# Altium PCB PCB.PcbDoc (part 1 of 2)
Units mil, origin at the board's own origin, x right, y up, seen from the top; angles counter-clockwise.
Board outline 2519.69 x 5118.11 mil, 2 copper layers (Top Layer, Bottom Layer); 143 components, 68 nets, 346 pads, 668 vias.
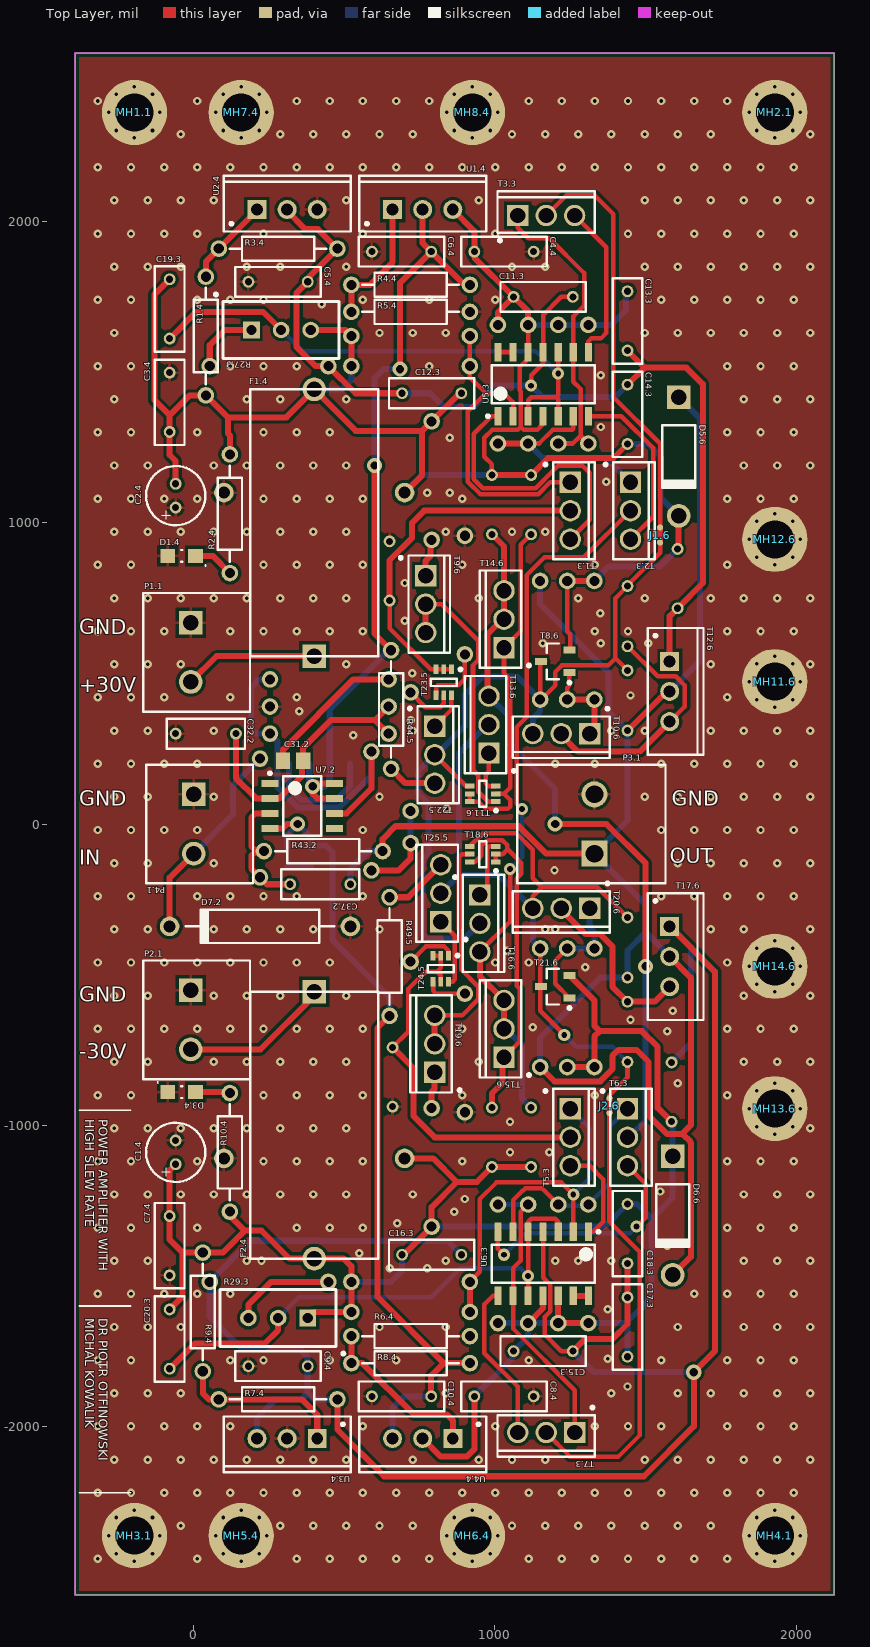
[diagram p0: Top Layer view]
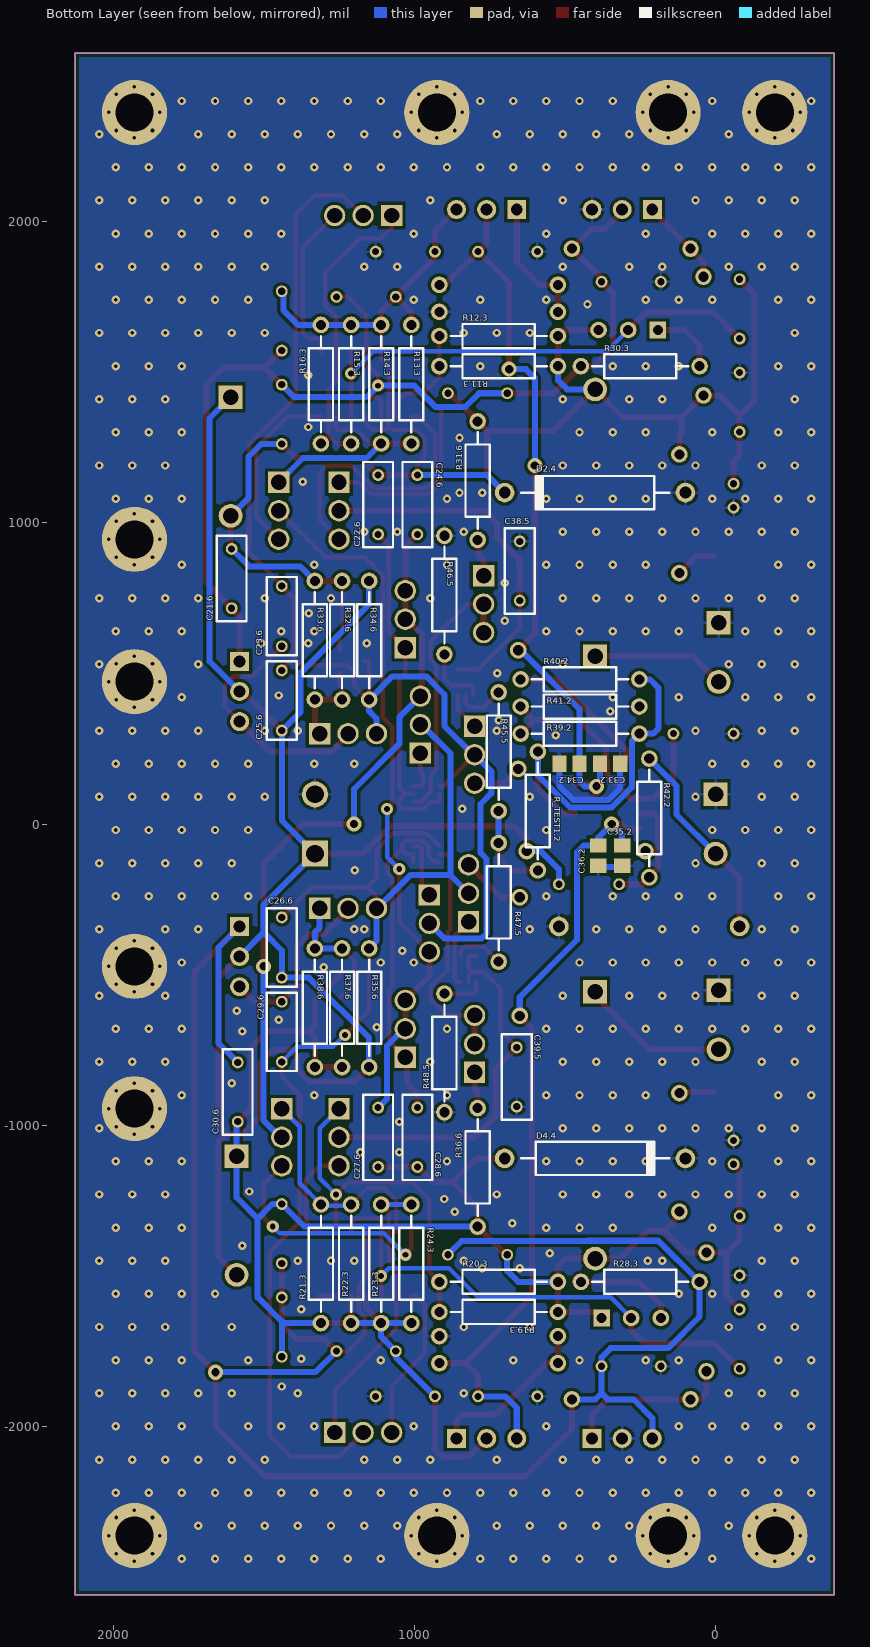
[diagram p1: Bottom Layer view, seen from below]
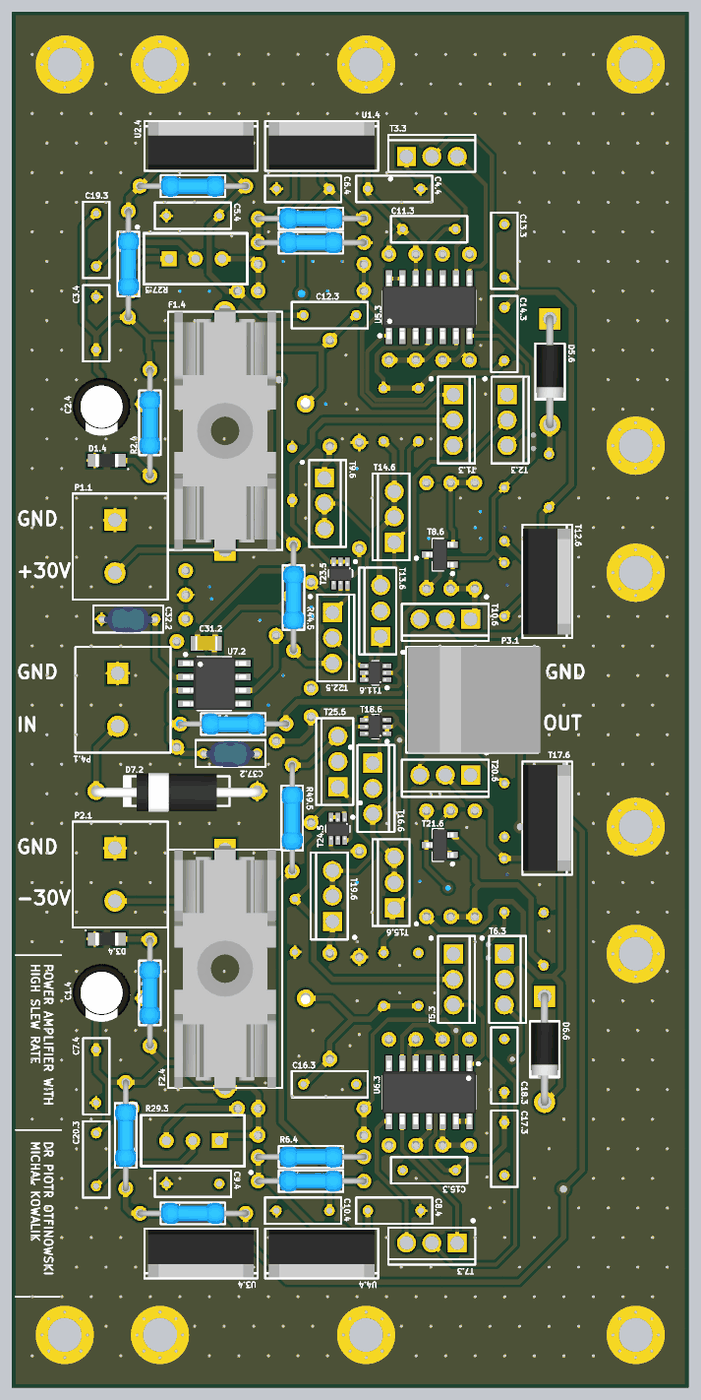
[diagram p3: 3D render of the assembled board from above, using the file's embedded part models]
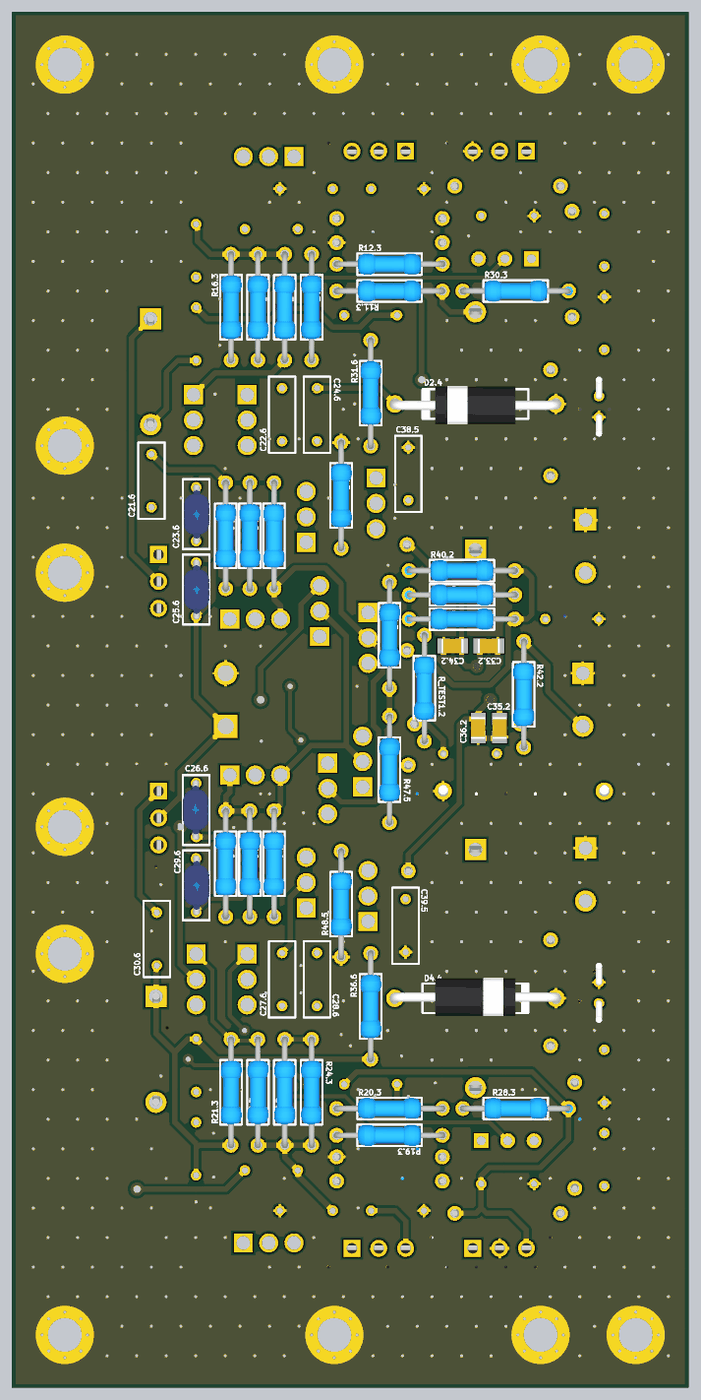
[diagram p4: 3D render of the assembled board from below, using the file's embedded part models]

## Layer stack, top to bottom
Top Solder: solder mask 0.4, Solder Resist, Dk 3.5
Top Layer: signal copper 1.4
Dielectric 1: dielectric 12.6, FR-4, Dk 4.8
Bottom Layer: signal copper 1.4
Bottom Solder: solder mask 0.4, Solder Resist, Dk 3.5

## Board outline
-393.7,-2559.06 2125.98,-2559.06 2125.98,2559.06 -393.7,2559.06

## Design rules (kind name [scope] priority, off if disabled: settings)
Clearance [All] p1: gap=10 ignorepadtopadclearanceinfootprint=FALSE except(0: Arc-Hole Track-Hole SMDPad-Hole THPad-Hole Via-Hole Fill-Hole Poly-Hole Region-Hole Text-Hole; 5: Arc-Arc Arc-Track Arc-SMDPad Track-Track Track-SMDPad SMDPad-SMDPad)
ComponentClearance [All] p1: gap=5 collisioncheckmode=3 verticalgap=5 showdistances=FALSE
HoleSize [All] p1: absolutevalues=TRUE maxlimit=393.7 minlimit=0.98 maxpercent=80.000 minpercent=20.000
MinimumSolderMaskSliver [All] p1: minsoldermaskwidth=7
PolygonConnect PolygonConnect_MH [HasFootprint('MOUNTING HOLE 2mm') or HasFootprint('MOUNTING HOLE 3mm')] p1: connectstyle=Direct reliefconductorwidth=10 reliefentries=4 polygonreliefangle="90 Angle" airgapwidth=10
PolygonConnect PolygonConnect_Via [IsVia] p2: connectstyle=Direct reliefconductorwidth=10 reliefentries=4 polygonreliefangle="90 Angle" airgapwidth=10
PolygonConnect [All] p3: connectstyle=Relief reliefconductorwidth=10 reliefentries=4 polygonreliefangle="90 Angle" airgapwidth=10
RoutingVias [All] p1: holewidth=28 width=50 viastyle="Through Hole" minholewidth=28 minwidth=50 maxholewidth=28 maxwidth=50 useviatemplates=TRUE viatemplateguid#1={2FC1EF2C-54B0-4321-A922-B4E43FDCBC3B} viatemplateguid#2={2E20B9D3-F2B5-4AFD-9AF6-546D8C0396F4} viatemplateguid#3={80472CAA-2F3E-4CAC-A699-F1DE7C723AF1} viatemplateguid#4={2B6C0CF2-D053-47F0-8854-E021E3530479} viatemplateguid#5={2C5E05DE-B0FE-4110-8685-EAD3206BB58E} viatemplatename#1=v71h30m0mx0 viatemplatename#2=v71h30m71 viatemplatename#3=v102h50m0mx0 viatemplatename#4=v127h70m0mx0 viatemplatename#5=v150h100m0mx0
SilkToSilkClearance [All] p1: silktosilkclearance=3
SilkToSolderMaskClearance [IsPad] p1: minsilkscreentomaskgap=5 clearancetoexposedcopper=TRUE
SolderMaskExpansion [All] p1: expansion=5
Width "Schematic Width Constraint_10" [InNet('+25V')] p1: maxlimit=20 minlimit=12 preferedwidth=15
Width "Schematic Width Constraint_9" [InNet('+30V')] p2: maxlimit=20 minlimit=12 preferedwidth=15
Width "Schematic Width Constraint_8" [InNet('-25V')] p3: maxlimit=20 minlimit=12 preferedwidth=15
Width "Schematic Width Constraint_7" [InNet('-30V')] p4: maxlimit=20 minlimit=12 preferedwidth=15
Width "Schematic Width Constraint_6" [InNet('GLOBAL_FEEDBACK')] p5: maxlimit=20 minlimit=12 preferedwidth=15
Width "Schematic Width Constraint_5" [InNet('IN_N_3_STAGE')] p6: maxlimit=20 minlimit=12 preferedwidth=15
Width "Schematic Width Constraint_4" [InNet('IN_P_3_STAGE')] p7: maxlimit=20 minlimit=12 preferedwidth=15
Width "Schematic Width Constraint_3" [InNet('NetC23.6_1')] p8: maxlimit=20 minlimit=12 preferedwidth=15
Width "Schematic Width Constraint_2" [InNet('NetC29.6_2')] p9: maxlimit=20 minlimit=12 preferedwidth=15
Width "Schematic Width Constraint_1" [InNet('NetR32.6_1')] p10: maxlimit=20 minlimit=12 preferedwidth=15
Width "Schematic Width Constraint" [InNet('NetR37.6_2')] p11: maxlimit=20 minlimit=12 preferedwidth=15
Width Width_POWER [InNetClass('POWER')] p12: maxlimit=30 minlimit=15 preferedwidth=25 minimp=50.000000 maximp=50.000000 favimp=50.000000
Width [Not InNetClass('POWER')] p13: maxlimit=20 minlimit=10 preferedwidth=15 minimp=50.000000 maximp=50.000000 favimp=50.000000
25 further rules are at their usual default settings.

## Classes and differential pairs
net class IBIAS_P[1..4]: IBIAS_P1 IBIAS_P2 IBIAS_P3
net class IBIAS_N[1..4]: IBIAS_N1 IBIAS_N2 IBIAS_N3
component class U_ThirdStageAmplifier: C21.6 C22.6 C23.6 C24.6 C25.6 C26.6 C27.6 C28.6 C29.6 C30.6 D5.6 D6.6 J1.6 J2.6 MH11.6 MH12.6 MH13.6 MH14.6 R31.6 R32.6 R33.6 R34.6 R35.6 R36.6 R37.6 R38.6 T8.6 T9.6 T10.6 T11.6 T12.6 T13.6 T14.6 T15.6 T16.6 T17.6 T18.6 T19.6 T20.6 T21.6
component class U_SecondStageAmplifier: C38.5 C39.5 R44.5 R45.5 R46.5 R47.5 R48.5 R49.5 T22.5 T23.5 T24.5 T25.5
component class U_Power: C1.4 C2.4 C3.4 C4.4 C5.4 C6.4 C7.4 C8.4 C9.4 C10.4 D1.4 D2.4 D3.4 D4.4 F1.4 F2.4 MH5.4 MH6.4 MH7.4 MH8.4 R1.4 R2.4 R3.4 R4.4 R5.4 R6.4 R7.4 R8.4 R9.4 R10.4 U1.4 U2.4 U3.4 U4.4
component class U_FirstStageAmplifier: C31.2 C32.2 C33.2 C34.2 C35.2 C36.2 C37.2 D7.2 R39.2 R40.2 R41.2 R42.2 R43.2 R_TEST1.2 U7.2
component class U_CurrentSources: C11.3 C12.3 C13.3 C14.3 C15.3 C16.3 C17.3 C18.3 C19.3 C20.3 R11.3 R12.3 R13.3 R14.3 R15.3 R16.3 R19.3 R20.3 R21.3 R22.3 R23.3 R24.3 R27.3 R28.3 R29.3 R30.3 T1.3 T2.3 T3.3 T5.3 T6.3 T7.3 U5.3 U6.3
component class Main: MH1.1 MH2.1 MH3.1 MH4.1 P1.1 P2.1 P3.1 P4.1

## Components (designator, comment, footprint, x,y, rotation, side; value= is the part's Value field where it differs from the comment)
C1.4 "Cap4 UPW" CAP-POLARISED-2MM -60,-1090 r270 top locked value=47uF (schematic designator C1)
C2.4 "Cap4 UPW" CAP-POLARISED-2MM -60,1090 r270 top locked value=47uF (schematic designator C2)
C3.4 "Cap1 MKS2" CAP-0.5-WIMA_MKS2 -80,1400 r270 top locked value=100nF (schematic designator C3)
C4.4 "Cap1 MKS2" CAP-0.5-WIMA_MKS2 1030,1900 r180 top locked value=100nF (schematic designator C4)
C5.4 "Cap1 MKS2" CAP-0.5-WIMA_MKS2 280,1800 r0 top locked value=100nF (schematic designator C5)
C6.4 "Cap1 MKS2" CAP-0.5-WIMA_MKS2 690,1900 r0 top locked value=100nF (schematic designator C6)
C7.4 "Cap1 MKS2" CAP-0.5-WIMA_MKS2 -80,-1400 r270 top locked value=100nF (schematic designator C7)
C8.4 "Cap1 MKS2" CAP-0.5-WIMA_MKS2 1030,-1900 r0 top locked value=100nF (schematic designator C8)
C9.4 "Cap1 MKS2" CAP-0.5-WIMA_MKS2 280,-1800 r180 top locked value=100nF (schematic designator C9)
C10.4 "Cap1 MKS2" CAP-0.5-WIMA_MKS2 690,-1900 r180 top locked value=100nF (schematic designator C10)
C11.3 "Cap1 MKS2" CAP-0.5-WIMA_MKS2 1160,1750 r180 top locked value=100nF (schematic designator C11)
C12.3 "Cap1 MKS2" CAP-0.5-WIMA_MKS2 790,1430 r0 top locked value=100nF (schematic designator C12)
C13.3 "Cap1 MKS2" CAP-0.5-WIMA_MKS2 1440,1670 r90 top locked value=100nF (schematic designator C13)
C14.3 "Cap1 MKS2" CAP-0.5-WIMA_MKS2 1440,1360 r270 top locked value=100nF (schematic designator C14)
C15.3 "Cap1 MKS2" CAP-0.5-WIMA_MKS2 1160,-1750 r0 top locked value=100nF (schematic designator C15)
C16.3 "Cap1 MKS2" CAP-0.5-WIMA_MKS2 790,-1430 r0 top locked value=100nF (schematic designator C16)
C17.3 "Cap1 MKS2" CAP-0.5-WIMA_MKS2 1440,-1670 r90 top locked value=100nF (schematic designator C17)
C18.3 "Cap1 MKS2" CAP-0.5-WIMA_MKS2 1440,-1360 r270 top locked value=100nF (schematic designator C18)
C19.3 "Cap1 MKS2" CAP-0.5-WIMA_MKS2 -80,1710 r90 top locked value=100nF (schematic designator C19)
C20.3 "Cap1 MKS2" CAP-0.5-WIMA_MKS2 -80,-1710 r270 top locked value=100nF (schematic designator C20)
C21.6 "Cap1 MKS2" CAP-0.5-WIMA_MKS2 1606.3,814.65 r90 bottom locked value=100nF (schematic designator C21)
C22.6 "Cap1 MKS2" CAP-0.5-WIMA_MKS2 1120,1060 r90 bottom locked value=100nF (schematic designator C22)
C23.6 "Cap2 C322" CAP-CERAMIC-200MIL 1440,690 r90 bottom locked value=470pF (schematic designator C23)
C24.6 "Cap1 MKS2" CAP-0.5-WIMA_MKS2 990,1060 r90 bottom locked value=100nF (schematic designator C24)
C25.6 "Cap2 C322" CAP-CERAMIC-200MIL 1440,410 r90 bottom locked value=470pF (schematic designator C25)
C26.6 "Cap2 C322" CAP-CERAMIC-200MIL 1440,-410 r270 bottom locked value=470pF (schematic designator C26)
C27.6 "Cap1 MKS2" CAP-0.5-WIMA_MKS2 1120,-1040 r90 bottom locked value=100nF (schematic designator C27)
C28.6 "Cap1 MKS2" CAP-0.5-WIMA_MKS2 990,-1040 r90 bottom locked value=100nF (schematic designator C28)
C29.6 "Cap2 C322" CAP-CERAMIC-200MIL 1440,-690 r90 bottom locked value=470pF (schematic designator C29)
C30.6 "Cap1 MKS2" CAP-0.5-WIMA_MKS2 1586.3,-889.84 r90 bottom locked value=100nF (schematic designator C30)
C31.2 "Cap3" CAP_0805_IPC_MD 330,210 r180 top locked value=100pF (schematic designator C31)
C32.2 "Cap2 C322" CAP-CERAMIC-200MIL 40,300 r0 top locked value=470pF (schematic designator C32)
C33.2 "Cap3" CAP_0805_IPC_MD 350,200 r0 bottom value=100pF (schematic designator C33)
C34.2 "Cap3" CAP_0805_IPC_MD 485,200 r180 bottom locked value=100pF (schematic designator C34)
C35.2 "Cap3" CAP_0805_IPC_MD 310,-105 r270 bottom value=100pF (schematic designator C35)
C36.2 "Cap3" CAP_0805_IPC_MD 390,-105 r270 bottom value=100pF (schematic designator C36)
C37.2 "Cap2 C322" CAP-CERAMIC-200MIL 420,-200 r0 top locked value=470pF (schematic designator C37)
C38.5 "Cap1 MKS2" CAP-0.5-WIMA_MKS2 650,840 r270 bottom locked value=100nF (schematic designator C38)
C39.5 "Cap1 MKS2" CAP-0.5-WIMA_MKS2 660,-840 r270 bottom locked value=100nF (schematic designator C39)
D1.4 "LED RED" DIO_0805_IPC_MD -40,890 r180 top locked (schematic designator D1)
D2.4 "1.5KE47C" DIODE-0.7 400,1100 r0 bottom locked (schematic designator D2)
D3.4 "LED BLUE" DIO_0805_IPC_MD -40,-890 r0 top locked (schematic designator D3)
D4.4 "1.5KE47C" DIODE-0.7 400,-1110 r180 bottom locked (schematic designator D4)
D5.6 "1N4004" DO-41 1610,1220 r270 top locked (schematic designator D5)
D6.6 "1N4004" DO-41 1590,-1300 r270 top locked (schematic designator D6)
D7.2 "1.5KE47CA" DIODE-0.7 220,-340 r180 top locked (schematic designator D7)
F1.4 "SCHURTER 0031.8201" "SCHURTER 0031.8201" 400,1000 r90 top locked value=200mA (schematic designator F1)
F2.4 "SCHURTER 0031.8201" "SCHURTER 0031.8201" 400,-1000 r270 top locked value=200mA (schematic designator F2)
J1.6 "NetTie" NETTIE_20mil 1548.23,984.25 r270 top net-tie (schematic designator J1)
J2.6 "NetTie" NETTIE_20mil 1380,-960 r90 top net-tie (schematic designator J2)
MH1.1 "Mounting Hole" "MOUNTING HOLE 3mm" -196.85,2362.2 r0 top locked (schematic designator MH1)
MH2.1 "Mounting Hole" "MOUNTING HOLE 3mm" 1929.13,2362.2 r0 top locked (schematic designator MH2)
MH3.1 "Mounting Hole" "MOUNTING HOLE 3mm" -196.85,-2362.2 r0 top locked (schematic designator MH3)
MH4.1 "Mounting Hole" "MOUNTING HOLE 3mm" 1929.13,-2362.2 r0 top locked (schematic designator MH4)
MH5.4 "Mounting Hole" "MOUNTING HOLE 3mm" 157.48,-2362.2 r0 top locked (schematic designator MH5)
MH6.4 "Mounting Hole" "MOUNTING HOLE 3mm" 925.2,-2362.2 r0 top locked (schematic designator MH6)
MH7.4 "Mounting Hole" "MOUNTING HOLE 3mm" 157.48,2362.2 r0 top locked (schematic designator MH7)
MH8.4 "Mounting Hole" "MOUNTING HOLE 3mm" 925.2,2362.2 r0 top locked (schematic designator MH8)
MH11.6 "Mounting Hole" "MOUNTING HOLE 3mm" 1929.13,472.44 r90 top locked (schematic designator MH11)
MH12.6 "Mounting Hole" "MOUNTING HOLE 3mm" 1929.13,944.88 r90 top locked (schematic designator MH12)
MH13.6 "Mounting Hole" "MOUNTING HOLE 3mm" 1929.13,-944.88 r90 top locked (schematic designator MH13)
MH14.6 "Mounting Hole" "MOUNTING HOLE 3mm" 1929.13,-472.44 r90 top locked (schematic designator MH14)
P1.1 "Header 2" DG300-5.0-02P-13 -10,570 r270 top locked (schematic designator P1)
P2.1 "Header 2" DG300-5.0-02P-13 -10,-650 r270 top locked (schematic designator P2)
P3.1 "Header 2" DG330-5.0-02P 1330,0 r90 top locked (schematic designator P3)
P4.1 "Header 2" DG300-5.0-02P-13 0,0 r270 top locked (schematic designator P4)
R1.4 "Res" RESISTOR-10mm 40,1620 r270 top locked value=1K (schematic designator R1)
R2.4 "Res" RESISTOR-10mm 120,1030 r90 top locked value=1K (schematic designator R2)
R3.4 "Res" RESISTOR-10mm 280,1910 r180 top locked value=1K (schematic designator R3)
R4.4 "Res" RESISTOR-10mm 720,1790 r180 top locked value=1K (schematic designator R4)
R5.4 "Res" RESISTOR-10mm 720,1700 r180 top locked value=1K (schematic designator R5)
R6.4 "Res" RESISTOR-10mm 720,-1700 r180 top locked value=1K (schematic designator R6)
R7.4 "Res" RESISTOR-10mm 280,-1910 r180 top locked value=1K (schematic designator R7)
R8.4 "Res" RESISTOR-10mm 720,-1790 r180 top locked value=1K (schematic designator R8)
R9.4 "Res" RESISTOR-10mm 30,-1620 r270 top locked value=1K (schematic designator R9)
R10.4 "Res" RESISTOR-10mm 120,-1090 r270 top locked value=1K (schematic designator R10)
R11.3 "Res" RESISTOR-10mm 720,1520 r180 bottom locked value=1K (schematic designator R11)
R12.3 "Res" RESISTOR-10mm 720,1620 r180 bottom locked value=1K (schematic designator R12)
R13.3 "Res" RESISTOR-10mm 1010,1460 r90 bottom locked value=1K (schematic designator R13)
R14.3 "Res" RESISTOR-10mm 1110,1460 r90 bottom locked value=1K (schematic designator R14)
R15.3 "Res" RESISTOR-10mm 1210,1460 r90 bottom locked value=1K (schematic designator R15)
R16.3 "Res" RESISTOR-10mm 1310,1460 r90 bottom locked value=1K (schematic designator R16)
R19.3 "Res" RESISTOR-10mm 720,-1620 r0 bottom locked value=1K (schematic designator R19)
R20.3 "Res" RESISTOR-10mm 720,-1520 r0 bottom locked value=1K (schematic designator R20)
R21.3 "Res" RESISTOR-10mm 1310,-1460 r90 bottom locked value=1K (schematic designator R21)
R22.3 "Res" RESISTOR-10mm 1210,-1460 r90 bottom locked value=1K (schematic designator R22)
R23.3 "Res" RESISTOR-10mm 1110,-1460 r90 bottom locked value=1K (schematic designator R23)
R24.3 "Res" RESISTOR-10mm 1010,-1460 r90 bottom locked value=1K (schematic designator R24)
R27.3 "Pot" T910W 290,1640 r0 top locked value=1K (schematic designator R27)
R28.3 "Res" RESISTOR-10mm 250,-1520 r180 bottom locked value=1K (schematic designator R28)
R29.3 "Pot" T910W 280,-1640 r180 top locked value=1K (schematic designator R29)
R30.3 "Res" RESISTOR-10mm 250,1520 r180 bottom locked value=1K (schematic designator R30)
R31.6 "Res" RESISTOR-10mm 790,1140 r90 bottom locked value=1K (schematic designator R31)
R32.6 "Res" RESISTOR-10mm 1240,610 r90 bottom locked value=1K (schematic designator R32)
R33.6 "Res" RESISTOR-10mm 1330,610 r90 bottom locked value=1K (schematic designator R33)
R34.6 "Res" RESISTOR-10mm 1150,610 r270 bottom locked value=1K (schematic designator R34)
R35.6 "Res" RESISTOR-10mm 1150,-610 r270 bottom locked value=1K (schematic designator R35)
R36.6 "Res" RESISTOR-10mm 790,-1140 r90 bottom locked value=1K (schematic designator R36)
R37.6 "Res" RESISTOR-10mm 1240,-610 r90 bottom locked value=1K (schematic designator R37)
R38.6 "Res" RESISTOR-10mm 1330,-610 r90 bottom locked value=1K (schematic designator R38)
R39.2 "Res" RESISTOR-10mm 450,300 r180 bottom locked value=1K (schematic designator R39)
R40.2 "Res" RESISTOR-10mm 450,480 r180 bottom locked value=1K (schematic designator R40)
R41.2 "Res" RESISTOR-10mm 450,390 r0 bottom locked value=1K (schematic designator R41)
R42.2 "Res" RESISTOR-10mm 220,20 r270 bottom locked value=1K (schematic designator R42)
R43.2 "Res" RESISTOR-10mm 430,-90 r0 top locked value=1K (schematic designator R43)
R44.5 "Res" RESISTOR-10mm 655,380 r90 top locked value=1K (schematic designator R44)
R45.5 "Res" RESISTOR-10mm 720,240 r90 bottom locked value=1K (schematic designator R45)
R46.5 "Res" RESISTOR-10mm 900,760 r270 bottom locked value=1K (schematic designator R46)
R47.5 "Res" RESISTOR-10mm 720,-260 r90 bottom locked value=1K (schematic designator R47)
R48.5 "Res" RESISTOR-10mm 900,-760 r270 bottom locked value=1K (schematic designator R48)
R49.5 "Res" RESISTOR-10mm 650,-440 r270 top locked value=1K (schematic designator R49)
R_TEST1.2 "Res" RESISTOR-10mm 590,43.15 r270 bottom locked value=1K (schematic designator R_TEST1)
T1.3 "TTA006B" TO-126 1250,1040 r0 top locked (schematic designator T1)
T2.3 "TTA006B" TO-126 1450,1040 r0 top locked (schematic designator T2)
T3.3 "TTA006B" TO-126 1170,2020 r90 top locked (schematic designator T3)
T5.3 "TTC011B" TO-126 1250,-1040 r0 top locked (schematic designator T5)
T6.3 "TTC011B" TO-126 1440,-1040 r0 top locked (schematic designator T6)
T7.3 "TTC011B" TO-126 1170,-2020 r270 top locked (schematic designator T7)
T8.6 "BCX42 PNP" SOT23_IPC_MD 1200,540 r180 top locked (schematic designator T8)
T9.6 "TTA006B" TO-126 770,730 r0 top locked (schematic designator T9)
T10.6 "TTA006B" TO-126 1220,300 r270 top locked (schematic designator T10)
T11.6 "BCM857BS" SOT363_IPC_MD 960,100 r180 top locked (schematic designator T11)
T12.6 "MJE15033" TO-220 1580,440 r270 top locked (schematic designator T12)
T13.6 "TTA006B" TO-126 980,330 r180 top locked (schematic designator T13)
T14.6 "TTA006B" TO-126 1030,680 r180 top locked (schematic designator T14)
T15.6 "TTC011B" TO-126 1030,-680 r180 top locked (schematic designator T15)
T16.6 "TTC011B" TO-126 950,-330 r0 top locked (schematic designator T16)
T17.6 "MJE15032" TO-220 1580,-440 r270 top locked (schematic designator T17)
T18.6 "DMMT3904W" SOT363_IPC_MD 960,-100 r180 top locked (schematic designator T18)
T19.6 "TTC011B" TO-126 800,-730 r180 top locked (schematic designator T19)
T20.6 "TTC011B" TO-126 1220,-280 r270 top locked (schematic designator T20)
T21.6 "BCX41 NPN" SOT23_IPC_MD 1200,-540 r180 top locked (schematic designator T21)
T22.5 "TTC011B" TO-126 800,230 r0 top locked (schematic designator T22)
T23.5 "DMMT3904W" SOT363_IPC_MD 830,470 r270 top locked (schematic designator T23)
T24.5 "BCM857BS" SOT363_IPC_MD 820,-480 r270 top locked (schematic designator T24)
T25.5 "TTA006B" TO-126 820,-230 r180 top locked (schematic designator T25)
U1.4 "LM317" TO-220 760,2040 r0 top locked (schematic designator U1)
U2.4 "LM317" TO-220 310,2040 r0 top locked (schematic designator U2)
U3.4 "LM337" TO-220 310,-2040 r180 top locked (schematic designator U3)
U4.4 "LM337" TO-220 760,-2040 r180 top locked (schematic designator U4)
U5.3 "MCP6074" SO_14_IPC_MD 1160,1460 r90 top locked (schematic designator U5)
U6.3 "MCP6074" SO_14_IPC_MD 1160,-1460 r270 top locked (schematic designator U6)
U7.2 "ADA4895-1" SOIC_8_IPC_MD 360,60 r0 top locked (schematic designator U7)

## Footprints (in the part's own frame and the unit in brackets; to place one, negate y for a bottom-side part, rotate by r counter-clockwise, add the part's x,y. Pads: shape width x height; smd on the part's side, far side on the other; paste and mask are expansions set on the pad)
CAP-0.5-WIMA_MKS2 [mm] "Metallized Polyester (PET)   Capacitors in PCM 5 mm"
  round 1 hole 0.6: 1(-2.5,0) 2(2.5,0)
  silkscreen extent -3.6,-1.25 3.6,1.25, body extent -3.6,-1.25 3.6,1.25, height 6.5
CAP-CERAMIC-200MIL [mm] "UPW, Aluminium Electrolytic Capacitor"
  round 1 hole 0.6: 1(-2.54,0) 2(2.54,0)
  silkscreen extent -3.3,-1.27 3.3,1.27, body extent -2.83,-1.27 2.83,1.18, height 6.7
CAP-POLARISED-2MM [mm] "UPW, Aluminium Electrolytic Capacitor"
  round 1 hole 0.6: 1(-1,0) 2(1,0)
  silkscreen extent -2.5,-2.5 2.5,2.5, body extent -2.84,-2.75 2.84,2.75, height 13
CAP_0805_IPC_MD [mm] "Chip Capacitor, 2-Leads, Body 2.00x1.25mm, IPC Medium Density"
  rect 1.2x1.4 smd: 1(-0.85,0) 2(0.85,0)
  body extent -1.05,-0.67 1.05,0.67, height 1.35
DG300-5.0-02P-13 [mm]
  rect 2x2 hole 1.3: 1(-2.5,0)
  round 2 hole 1.3: 2(2.5,0)
  silkscreen extent -5,-4 5,5, body extent -5.5,-3.2 5.1,4.4, height 10
DG330-5.0-02P [mm]
  rect 2.2x2.2 hole 1.5: 1(-2.5,0)
  round 2.2 hole 1.5: 2(2.5,0)
  silkscreen extent -5,-6 5,6.5, body extent -5,-6.2 5,6.3, height 12.5
DIO_0805_IPC_MD [mm] "Chip Diode, 2-Leads, Body 2,00x1,25mm, IPC Medium Density"
  rect 1.25x1.2 smd: 1(-1.175,0) 2(1.175,0)
  silkscreen extent -2.06,-0.5 0.05,0.86, body extent -1.1,-0.63 1.1,0.63, height 1.1
DIODE-0.7 [mm] "Diode, Thru-Hole; 2 Leads; 0.7 in Pin Spacing"
  round 1.65 hole 1: 1(-7.62,0) 2(7.62,0)
  silkscreen extent -6.25,-1.4 6.25,1.4, body extent -8.07,-1.94 8.07,2.02, height 6.2
DO-41 [mm] "Diode, Axial; Body 5.2 x 2.7 mm (LxDia. max), Lead Dia. 0.86 mm (max)"
  rect 2x2 hole 1.3: 1(-5,0)
  round 2 hole 1.3: 2(5,0)
  silkscreen extent -2.65,-1.4 2.75,1.4, body extent -5.38,-1.25 5.32,1.25, height 4.75
"MOUNTING HOLE 3mm" [mm]
  round 5.5 hole 3.2 paste+0 mask+0: MOUNTING(0,0)
NETTIE_20mil [mil]
  round 20 smd paste+0 mask+0: 1(0,0) 2(50,0)
  Top Layer lines w20: 50,0 0,0
RESISTOR-10mm [mm] "Axial Device, Thru-Hole; 2 Leads; 0.4 in Pin Spacing"
  round 1.4 hole 0.85: 1(-5,0) 2(5,0)
  silkscreen extent -4.06,-1.02 4.06,1.02, body extent -5.27,-1 5.27,1, height 4.5
"SCHURTER 0031.8201" [mm] "Fuseholder Open Design, 5 x 20 mm, THT, var. Covers, IEC 60335-1"
  rect 2x2 hole 1.3: 1(-11.25,0)
  round 2 hole 1.3: 2(11.25,0)
  silkscreen extent -11.25,-5.4 11.25,5.4, body extent -11.55,-4.8 11.55,4.8, height 13.1
SO_14_IPC_MD [mm] "SOP, 14-Leads, Body 8,65x3,90mm, Pitch 1,27mm, IPC Medium Density"
  rect 1.55x0.6 smd: 1(-2.7,3.81) 2(-2.7,2.54) 3(-2.7,1.27) 4(-2.7,0) 5(-2.7,-1.27) 6(-2.7,-2.54) 7(-2.7,-3.81) 8(2.7,-3.81) 9(2.7,-2.54) 10(2.7,-1.27) 11(2.7,0) 12(2.7,1.27) 13(2.7,2.54) 14(2.7,3.81)
  silkscreen extent -2.82,-4.35 1.6,4.78, body extent -3,-4.4 3,4.4, height 1.75
SOIC_8_IPC_MD [mm] "SOIC, 8-Leads, Pitch 1,27mm, IPC Medium Density"
  rect 1.45x0.6 smd: 1(-2.725,1.905) 2(-2.725,0.635) 3(-2.725,-0.635) 4(-2.725,-1.905) 5(2.725,-1.905) 6(2.725,-0.635) 7(2.725,0.635) 8(2.725,1.905)
  silkscreen extent -2.85,-2.5 1.6,2.88, body extent -3,-2.5 3,2.5, height 1.75
SOT23_IPC_MD [mm] "SOT23, 3-Leads, Body 2.90x2.45mm, Pitch 0.95mm, IPC Medium Density"
  rect 1x0.6 smd: 1(-1.2,0.95) 2(-1.2,-0.95) 3(1.2,0)
  silkscreen extent -1.33,-1.5 0.7,1.92, body extent -1.3,-1.5 1.3,1.5, height 1.1
SOT363_IPC_MD [mm] "TSOP, 6-Leads, Body 2,00x1,25mm, Pitch 0,65mm, IPC Medium Density"
  rect 0.8x0.42 smd: 1(-1.1,0.65) 2(-1.1,0) 3(-1.1,-0.65) 4(1.1,-0.65) 5(1.1,0) 6(1.1,0.65)
  silkscreen extent -1.23,-1.1 0.3,1.53, body extent -1.02,-1.1 1.02,1.1, height 1.22
T910W [mm]
  rect 1.4x1.4 hole 0.85: 1(-2.5,0)
  round 1.4 hole 0.85: 2(0,0) 3(2.5,0)
  silkscreen extent -5.62,-2.4 4.9,3.12, body extent -4.75,-2.4 4.75,2.4, height 11.5
TO-126 [mm] "FM, 3-Leads, Body 8.2x3.5mm, Pitch 2.4mm"
  rect 1.8x1.8 hole 1.3: 1(0,2.4)
  round 1.8 hole 1.3: 2(0,0) 3(0,-2.4)
  silkscreen extent -2.22,-4.1 2.05,4.1, body extent -1.45,-4.1 2.05,4.1, height 13.1
TO-220 [mm] "TO, Thru-Hole, Vertical, Heatsink Mounted; 3 In-Line Leads; Pitch 2.54 mm"
  rect 1.6x1.6 hole 1: 1(-2.54,0)
  round 1.6 hole 1: 2(0,0) 3(2.54,0)
  silkscreen extent -5.35,-1.85 5.35,2.85, body extent -5,-1.78 5,2.74, height 20.04

## Part data
C1.4 C2.4: library part Cap4, "Nichicon UPW Aluminium Electrolytic Capacitor"
C3.4 C4.4 C5.4 C6.4 C7.4 C8.4 C9.4 C10.4 C11.3 C12.3 C13.3 C14.3 C15.3 C16.3 C17.3 C18.3 C19.3 C20.3 C21.6 C22.6 C24.6 C27.6 C28.6 C30.6 C38.5 C39.5: library part Cap1, "WIMA MKS2 Metallized Polyester (PET)  / Capacitors in PCM 5 mm"
C23.6 C25.6 C26.6 C29.6 C32.2 C37.2: library part Cap2, "KEMEX Radial Leaded Multilayer Ceramic Capacitors / Goldmax, 300 Series, Conformally Coated,  / C0G Dielectric, 25 – 250 VDC (Commercial Grade)"
C31.2 C33.2 C34.2 C35.2 C36.2: "Standard SMD 0805 Capacitor"
D1.4: "Standard SMD 0805 Red LED", LatestRevisionDate=08-Jul-2005, LatestRevisionNote="Mech Layer 1 removed.", PackageDescription="LED; 2 Leads", PackageReference=LED-1, Published=8-Jun-2000, Publisher="Altium Limited"
D2.4 D4.4 D7.2: "Transient Voltage Suppressor Diodes; Breakdown V: 44.7...49.4, Stand-off V: 40.2"
D3.4: "Standard SMD 0805 Blue LED", LatestRevisionDate=08-Jul-2005, LatestRevisionNote="Mech Layer 1 removed.", PackageDescription="LED; 2 Leads", PackageReference=LED-1, Published=8-Jun-2000, Publisher="Altium Limited"
D5.6 D6.6: "Standard Recovery Rectifier Diodes"
F1.4 F2.4: library part Fuse, "Fuseholder Open Design, 5 x 20 mm, THT, SCHURTER 0031.8201"
P1.1 P2.1 P3.1 P4.1: "Header, 2-Pin", LatestRevisionDate=17-Jul-2002, LatestRevisionNote="Re-released for DXP Platform.", Publisher="Altium Limited"
R1.4 R2.4 R3.4 R4.4 R5.4 R6.4 R7.4 R8.4 R9.4 R10.4 R11.3 R12.3 R13.3 R14.3 R15.3 R16.3 R19.3 R20.3 R21.3 R22.3 R23.3 R24.3 R28.3 R30.3 R31.6 R32.6 R33.6 R34.6 R35.6 R36.6 R37.6 R38.6 R39.2 R40.2 R41.2 R42.2 R43.2 R44.5 R45.5 R46.5 R47.5 R48.5 R49.5 R_TEST1.2: "Resistor"
R27.3 R29.3: "Potentiometer"
T1.3 T2.3 T3.3 T9.6 T10.6 T13.6 T14.6 T25.5: "PNP High Voltage Transistor", ComponentLink1Description="Manufacturer Link", ComponentLink1URL=http://www.fairchildsemi.com/, ComponentLink2Description=Datasheet, ComponentLink2URL=http://www.fairchildsemi.com/ds/2N%2F2N3906.pdf
T5.3 T6.3 T7.3 T15.6 T16.6 T19.6 T20.6 T22.5: "NPN High Voltage Transistor", ComponentLink1Description="Manufacturer Link", ComponentLink1URL=http://www.fairchildsemi.com/, ComponentLink2Description=Datasheet, ComponentLink2URL=http://www.fairchildsemi.com/ds/2N%2F2N3904.pdf
T8.6: library part BCX42, "PNP Silicon AF and Switching Transistor", ComponentLink1Description="Manufacturer Link", ComponentLink1URL=http://www.fairchildsemi.com/, ComponentLink2Description=Datasheet, ComponentLink2URL=http://www.fairchildsemi.com/ds/2N%2F2N3906.pdf
T11.6 T18.6 T23.5 T24.5: "40V MATCHED PAIR NPN SMALL SIGNAL TRANSISTOR"
T12.6: "PNP High Power Transistor", ComponentLink1Description="Manufacturer Link", ComponentLink1URL=http://www.fairchildsemi.com/, ComponentLink2Description=Datasheet, ComponentLink2URL=http://www.fairchildsemi.com/ds/2N%2F2N3904.pdf
T17.6: "NPN High Power Transistor", ComponentLink1Description="Manufacturer Link", ComponentLink1URL=http://www.fairchildsemi.com/, ComponentLink2Description=Datasheet, ComponentLink2URL=http://www.fairchildsemi.com/ds/2N%2F2N3904.pdf
T21.6: library part BCX41, "NPN Silicon AF and Switching Transistor", ComponentLink1Description="Manufacturer Link", ComponentLink1URL=http://www.fairchildsemi.com/, ComponentLink2Description=Datasheet, ComponentLink2URL=http://www.fairchildsemi.com/ds/2N%2F2N3904.pdf
U1.4 U2.4: "Wide Temperature Three-Pin Positive Adjustable Regulator"
U3.4 U4.4: "Wide Temperature Three-Pin Negative Adjustable Regulator"
U5.3 U6.3: "110 µA, High Precision Quad Op Amp, 14-Pin SOIC, Extended Temperature, Tape and Reel", Supplier Part Number 1=MCP6074T-E/SL-ND, Code_IPC=SOIC127P600-14, Code_JEDEC=MS-012-AB, ComponentLink1Description=Datasheet, ComponentLink1URL=http://ww1.microchip.com/downloads/en/DeviceDoc/22142a.pdf, ComponentLink2Description="Packaging Specification", ComponentLink2URL=http://www.microchip.com/stellent/groups/techpub_sg/documents/packagingspec/en012702.pdf, ComponentLink3Description="Microchip.com Home", ComponentLink3URL=http://www.microchip.com/, DatasheetVersion="revA, Mar-2009", PackageDescription="14-Lead Plastic Small Outline (SL) - Narrow, 3.90mm Body [SOIC]", PackageReference=SOIC-SL14, PackageVersion="revBB, Aug-2009", Published=2-Dec-2009, Publisher="Altium Limited", Supplier 1=Digi-Key
U7.2: "Low Power, 1 nV/?Hz, G ? 10 Stable, Rail-to-Rail Output Amplifier"

## Via types
v1: diameter 28, hole 11.81, Top Layer to Bottom Layer, tented both sides, 652 vias
v2: diameter 40, hole 19.68, Top Layer to Bottom Layer, tented both sides, 9 vias
v3: diameter 50, hole 27.56, Top Layer to Bottom Layer, tented both sides, 7 vias

## Nets (pads, with @x,y where several pads share a name; then routed paths per layer and width w, separated by ;. In a path a pad name is that pad's centre, name@x,y a point inside that pad or via, vN(x,y) a via of type N, cw(c..) or ccw(c..) an arc to the next point about the centre after c; other vN are vias at no path point)
+5V: C6.4.2 C33.2.2 C34.2.2 R4.4.1 R44.5.2 U1.4.2 U7.2.7 U7.2.8 | length 2621.3
  Top Layer w20: U7.2.7@467.28,85 410,85 395,100 v3(395,125) 405,135 U7.2.8@467.28,135 ; v3(600,1190) 600,631.85 R44.5.2@655,576.85 ; v3(685,1510) 685,1796.57 C6.4.2@788.43,1900 ; U1.4.2@760,2040 760,1928.43 C6.4.2@788.43,1900 ; R4.4.1@916.85,1790 898.43,1790 C6.4.2@788.43,1900
  Bottom Layer w20: C33.2.2@383.46,200 383.46,136.54 v3(395,125) 435,125 451.54,141.54 C34.2.2@451.54,200 451.54,381.54 R44.5.2@646.85,576.85 ; v3(600,1190) 600,1480.08 629.92,1510 v3(685,1510)
+25V: C5.4.2 C11.3.1 C12.3.1 C13.3.1 C14.3.1 C21.6.1 R3.4.1 R30.3.1 T12.6.1 U2.4.2 U5.3.11 | length 3559
  Top Layer w15: v2(1120,1455) 1120,1490 1160,1530 U5.3.11@1160,1566.3 1160,1690 1220,1750 C11.3.1@1258.43,1750
  Top Layer w20: U2.4.2@310,2040 310,2035 370,1975 411.85,1975 R3.4.1@476.85,1910 378.43,1811.57 C5.4.2@378.43,1800 340.87,1762.44 340.87,1584.13 405,1520 R30.3.1@446.85,1520 536.85,1430 C12.3.1@691.57,1430 ; C14.3.1@1440,1458.43 1496.57,1515 1635,1515 1690,1460 1690,799.92 C21.6.1@1606.3,716.22 1580,689.92 T12.6.1@1580,540 ; C13.3.1@1440,1571.57 1491.57,1520
  Bottom Layer w20: C12.3.1@691.57,1430 785,1430 830,1385 930,1385 1000,1455 v2(1120,1455) 1158.15,1416.85 1398.43,1416.85 C14.3.1@1440,1458.43
+30V: C2.4.1 C3.4.2 C4.4.2 C11.3.2 C12.3.2 C13.3.2 C14.3.2 C19.3.2 C21.6.2 C22.6.2 C24.6.2 D2.4.2 D5.6.2 F1.4.2 R1.4.2 R2.4.2 R11.3.2 R12.3.2 R13.3.2 R14.3.2 R15.3.2 R16.3.2 R27.3.3 R31.6.2 R32.6.2 R33.6.2 T8.6.2 U1.4.3 U5.3.4 U5.3.12 | length 6340.5
  Top Layer w15: C12.3.2@883.15,1430 C12.3.2@888.43,1430 ; C24.6.2@990,1158.43 990,1194.37 964.94,1219.43 964.94,1281.81 991.34,1308.21 1075.89,1308.21 1085.69,1318.01 ; R14.3.2@1110,1656.85 U5.3.12@1110,1566.3 1110,1544.58 1082.5,1517.08 1082.5,1439.47 1085.69,1436.28 1085.69,1318.01 ; U5.3.4@1160,1353.7 1160,1328.21 1140,1308.21 1095.49,1308.21 1085.69,1318.01 ; R32.6.2@1240,806.85 1240,639.23 1250,629.23 1250,580.16 T8.6.2@1247.24,577.4
  Top Layer w20: C19.3.2@-80,1808.43 -130,1758.43 -130,1406.85 -80,1356.85 ; C2.4.1@-60,1129.37 -60,1205 -80,1225 C3.4.2@-80,1301.57 -80,1356.85 ; R2.4.2@120,1226.85 120,1290 113.15,1296.85 113.15,1350 ; R27.3.3@388.43,1640 503.15,1640 R12.3.2@523.15,1620 R11.3.2@523.15,1520 ; D2.4.2@700,1100 758.43,1158.43 758.43,1305.28 ; U1.4.3@860,2040 931.57,1968.43 C4.4.2@931.57,1900 931.57,1880 C11.3.2@1061.57,1750 ; C12.3.2@883.15,1430 R31.6.2@790,1336.85 758.43,1305.28 ; C24.6.2@990,1158.43 C22.6.2@1120,1158.43 1176.57,1215 1393.43,1215 C14.3.2@1440,1261.57 ; R13.3.2@1010,1656.85 1010,1698.43 C11.3.2@1061.57,1750 ; R14.3.2@1110,1656.85 1110,1701.57 C11.3.2@1061.57,1750 ; R32.6.2@1240,806.85 R33.6.2@1330,806.85 ; C21.6.2@1606.3,913.07 1610.01,916.78 D5.6.2@1610.01,1023.15 ; -80,1356.85 -13.7,1423.15 R1.4.2@40,1423.15 113.15,1350 ; 113.15,1350 307.09,1350 F1.4.2@400,1442.91 537.64,1305.28 758.43,1305.28
  Bottom Layer w20: F1.4.2@400,1442.91 492.91,1442.91 523.15,1473.15 R11.3.2@523.15,1520 ; D2.4.2@700,1100 758.43,1158.43 C24.6.2@990,1158.43 ; R14.3.2@1110,1656.85 R15.3.2@1210,1656.85 R16.3.2@1310,1656.85 1386.85,1656.85 1435,1705 1435,1763.43 C13.3.2@1440,1768.43 ; R33.6.2@1330,806.85 1378.15,855 1548.23,855 C21.6.2@1606.3,913.07 ; C14.3.2@1440,1261.57 1508.43,1261.57 1550,1220 1550,1083.16 D5.6.2@1610.01,1023.15
-5V: C10.4.1 C35.2.1 C36.2.1 R8.4.1 R49.5.2 U4.4.3 U7.2.4 | length 2711.6
  Top Layer w20: U7.2.4@252.72,-15 295,-15 310,0 v3(345,0) ; R49.5.2@650,-636.85 610,-676.85 610,-1570 830,-1790 ; C10.4.1@788.43,-1900 788.43,-1831.57 830,-1790 ; R8.4.1@916.85,-1790 830,-1790
  Bottom Layer w20: C35.2.1@310,-76.54 C35.2.1@310,-71.54 310,-35 v3(345,0) 390,-45 C36.2.1@390,-71.54 ; C36.2.1@393.46,-80 390,-76.54 C36.2.1@390,-71.54 ; R49.5.2@650,-636.85 650,-574.49 460,-384.49 460,-93.46 438.07,-71.54 C36.2.1@390,-71.54 ; U4.4.3@660,-2040 660,-1938.43 698.43,-1900 C10.4.1@788.43,-1900
-25V: C9.4.1 C15.3.2 C16.3.2 C17.3.2 C18.3.2 C30.6.2 R7.4.1 R28.3.2 T17.6.1 U3.4.3 U6.3.4 | length 6905
  Top Layer w15: U6.3.4@1160,-1353.7 1160,-1506.3 1184.31,-1530.61 1184.31,-1617.19 1164.94,-1636.56 1164.94,-1694.94 1220,-1750 C15.3.2@1258.43,-1750
  Top Layer w20: R7.4.1@476.85,-1910 476.85,-2010 632.2,-2165.35 1494.65,-2165.35 1660,-2000.01 v3(1660,-1820) 1730,-1750 1730,-490 T17.6.1@1580,-340 ; C15.3.2@1258.43,-1750 1298.43,-1710 1390,-1710 1440,-1660 C17.3.2@1440,-1571.57 C18.3.2@1440,-1458.43
  Bottom Layer w20: U3.4.3@210,-2040 210,-1972.28 272.28,-1910 358.19,-1910 378.43,-1889.76 ; R7.4.1@476.85,-1910 398.66,-1910 378.43,-1889.76 ; C16.3.2@888.43,-1430 842.83,-1384.41 425.46,-1384.41 424.59,-1383.54 189.61,-1383.54 R28.3.2@53.15,-1520 53.15,-1635.52 157.63,-1740 348.43,-1740 378.43,-1770 C9.4.1@378.43,-1800 378.43,-1889.76 ; C15.3.2@1258.43,-1750 1328.43,-1820 v3(1660,-1820) ; T17.6.1@1580,-340 1650,-410 1650,-727.72 C30.6.2@1586.3,-791.42
-30V: C1.4.2 C7.4.1 C8.4.1 C15.3.1 C16.3.1 C17.3.1 C18.3.1 C20.3.1 C27.6.1 C28.6.1 C30.6.1 D4.4.1 D6.6.1 F2.4.2 R9.4.1 R10.4.2 R19.3.1 R20.3.1 R21.3.1 R22.3.1 R23.3.1 R24.3.1 R29.3.1 R36.6.1 R37.6.1 R38.6.1 T21.6.2 U4.4.2 U6.3.11 U6.3.12 | length 6469.1
  Top Layer w20: C20.3.1@-80,-1611.57 -36.85,-1568.43 -36.85,-1423.15 ; C1.4.2@-60,-1129.37 -80,-1149.37 C7.4.1@-80,-1301.57 -80,-1380 -36.85,-1423.15 ; R10.4.2@120,-1286.85 120,-1300 170,-1350 ; R29.3.1@378.43,-1640 398.43,-1620 R19.3.1@523.15,-1620 R20.3.1@523.15,-1520 523.15,-1468.15 497.91,-1442.91 F2.4.2@400,-1442.91 317.91,-1442.91 225,-1350 170,-1350 ; C16.3.1@691.57,-1430 696.85,-1430 R36.6.1@790,-1336.85 790,-1271.85 873.43,-1188.43 ; D4.4.1@700,-1110 795,-1110 873.43,-1188.43 ; U4.4.2@760,-2040 820,-2100 906.85,-2100 931.57,-2075.28 C8.4.1@931.57,-1900 ; R23.3.1@1110,-1656.85 1160,-1606.85 U6.3.11@1160,-1566.3 ; C27.6.1@1120,-1138.43 C28.6.1@990,-1138.43 940,-1188.43 873.43,-1188.43 ; U6.3.12@1210,-1566.3 R22.3.1@1210,-1656.85 R21.3.1@1310,-1656.85 ; R37.6.1@1240,-806.85 R38.6.1@1330,-806.85 1330,-705.12 1347.56,-687.56 ; T21.6.2@1247.24,-502.6 1330,-585.35 1330,-670 1347.56,-687.56 ; C30.6.1@1586.3,-988.27 1540,-941.97 1540,-740 1487.56,-687.56 1347.56,-687.56 ; -36.85,-1423.15 R9.4.1@30,-1423.15 96.85,-1423.15 170,-1350
  Bottom Layer w20: R20.3.1@523.15,-1520 655,-1520 691.57,-1483.43 C16.3.1@691.57,-1430 ; R36.6.1@790,-1336.85 1364.72,-1336.85 C18.3.1@1440,-1261.57 1471.57,-1261.57 1520,-1310 ; C8.4.1@931.57,-1900 1061.57,-1770 C15.3.1@1061.57,-1750 1110,-1701.57 R23.3.1@1110,-1656.85 ; R24.3.1@1010,-1656.85 R23.3.1@1110,-1656.85 ; R22.3.1@1210,-1656.85 R23.3.1@1110,-1656.85 ; R21.3.1@1310,-1656.85 1430,-1656.85 1440,-1666.85 ; C17.3.1@1440,-1768.43 1440,-1666.85 ; C30.6.1@1586.3,-988.27 1590,-991.97 D6.6.1@1590,-1103.15 1590,-1240 1520,-1310 ; 1440,-1666.85 1440,-1651.57 1520,-1571.57 1520,-1310
GLOBAL_FEEDBACK: C25.6.1 C26.6.2 C37.2.2 D5.6.1 D6.6.2 P3.1.1 R34.6.1 R35.6.2 R43.2.2 T12.6.2 T17.6.2 | length 6302.3
  Top Layer w20: R43.2.2@636.85,-90 626.85,-80 626.85,-50 669.35,-7.5 1079.32,-7.5 1170.24,-98.43 P3.1.1@1330,-98.43 ; R35.6.2@1150,-806.85 1197.56,-854.41 1349.7,-854.41 1390,-814.11 1390,-770 1410,-750 1470,-750 1510,-790 1510,-968.09 1571.44,-1029.53 1620,-1029.53 ; C25.6.1@1440,310 1570,440 T12.6.2@1580,440 ; T17.6.2@1580,-440 1650,-510 1650,-1000 ; D6.6.2@1590.01,-1496.85 1650,-1436.86 1650,-1059.53 1649.37,-1058.9 1649.37,-1055.5 1623.4,-1029.53 1620,-1029.53 ; 1649.53,-1000 1620,-1029.53
  Bottom Layer w20: C37.2.2@520,-200 520,-150 580,-90 R43.2.2@626.85,-90 ; R35.6.2@1150,-806.85 1150,-710 1350,-510 C26.6.2@1440,-510 1440,-420 1500,-360 ; R34.6.1@1150,806.85 1150,730 1377.56,502.44 1377.56,372.44 C25.6.1@1440,310 1440,11.57 P3.1.1@1330,-98.43 1500,-268.43 1500,-360 ; T17.6.2@1580,-440 1500,-360 ; T12.6.2@1580,440 1680,540 1680,1346.85 D5.6.1@1610,1416.85